# Altium PCB PP_0_3.PcbDoc
Units mm, origin at the board's own origin, x right, y up, seen from the top; angles counter-clockwise.
Board outline 108 x 93.53 mm, 2 copper layers (Top Layer, Bottom Layer), stack 1.58 mm thick; 24 components, 10 nets, 45 pads, 1 vias.
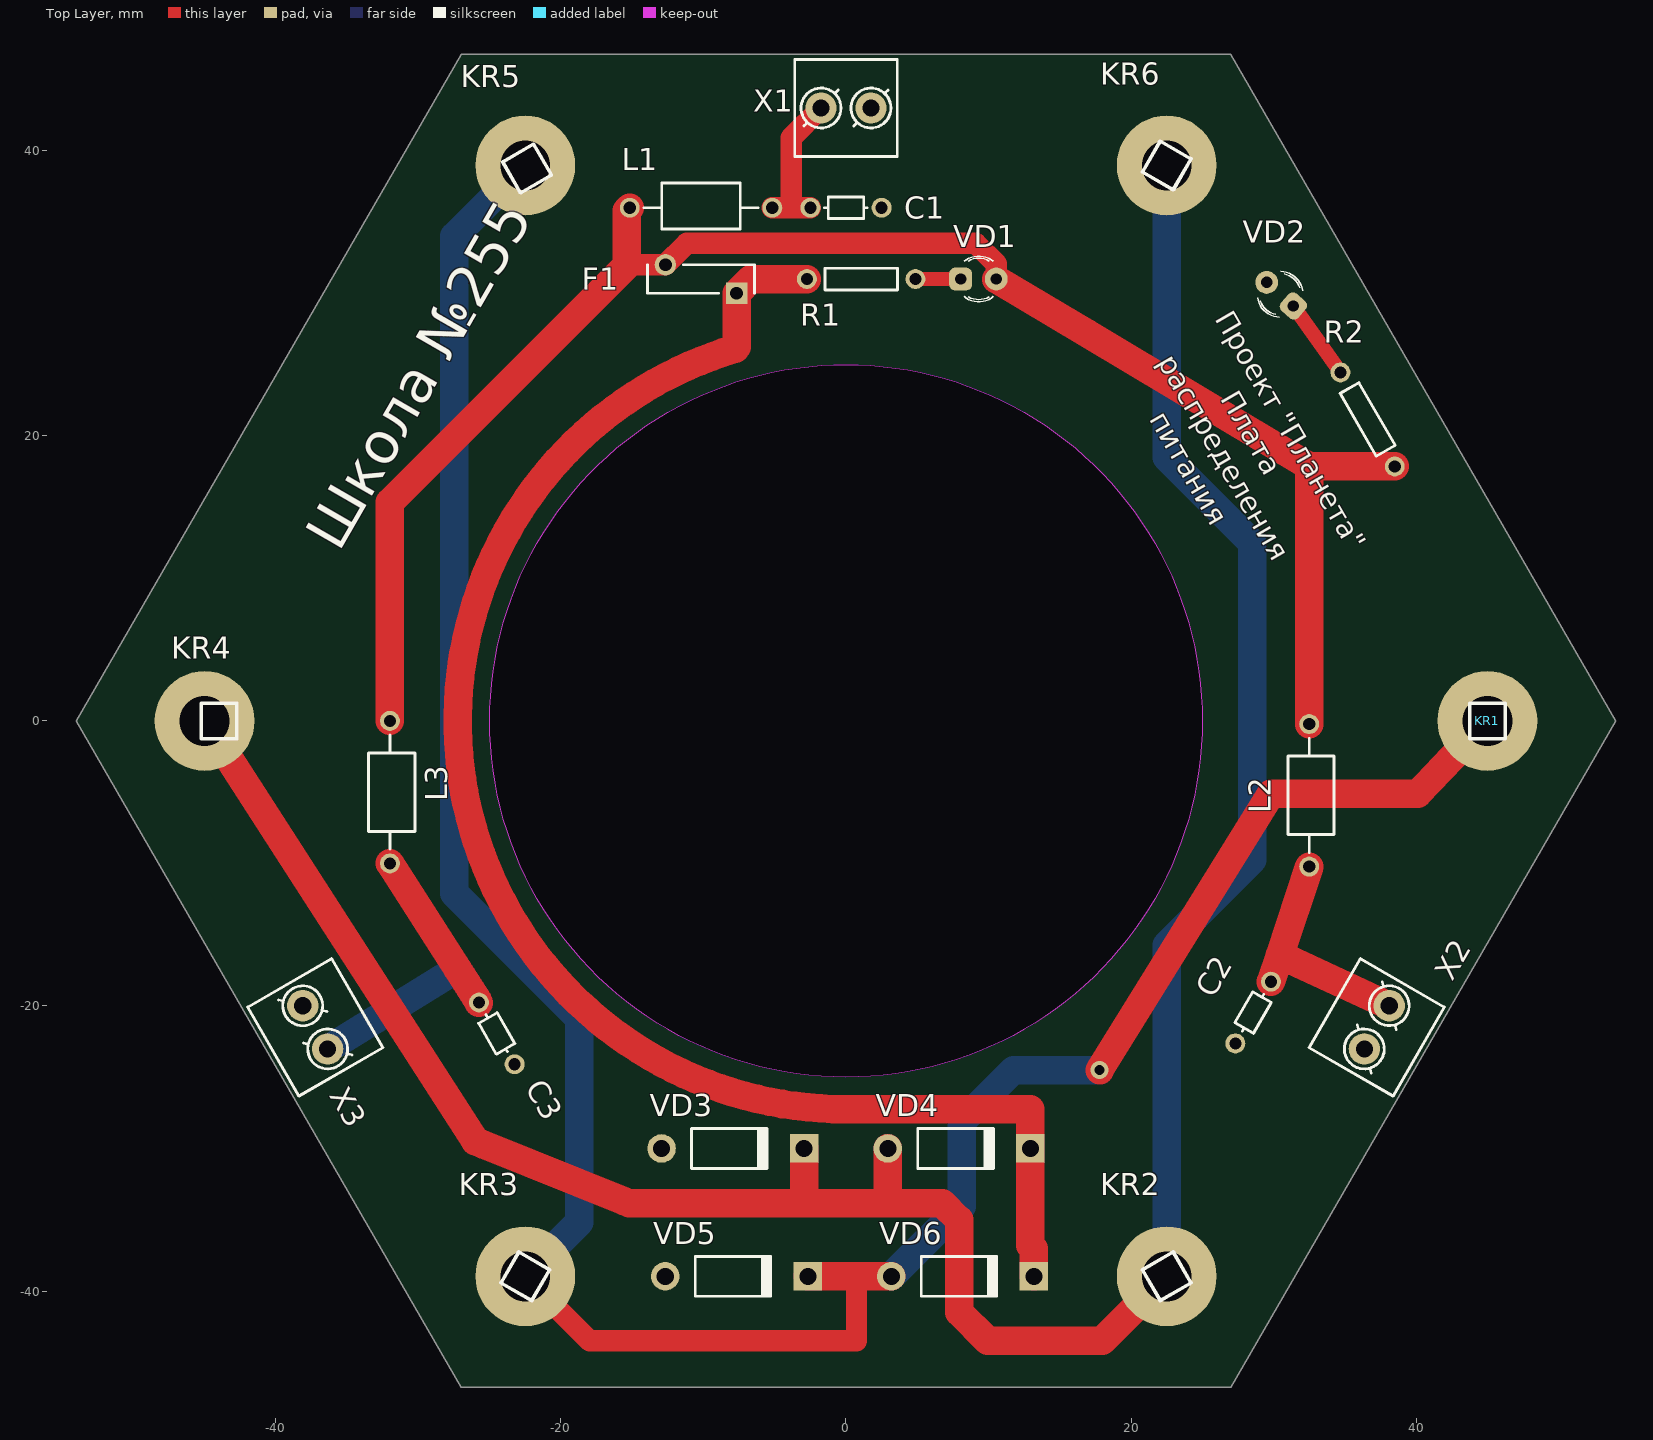
[diagram p0: Top Layer view]
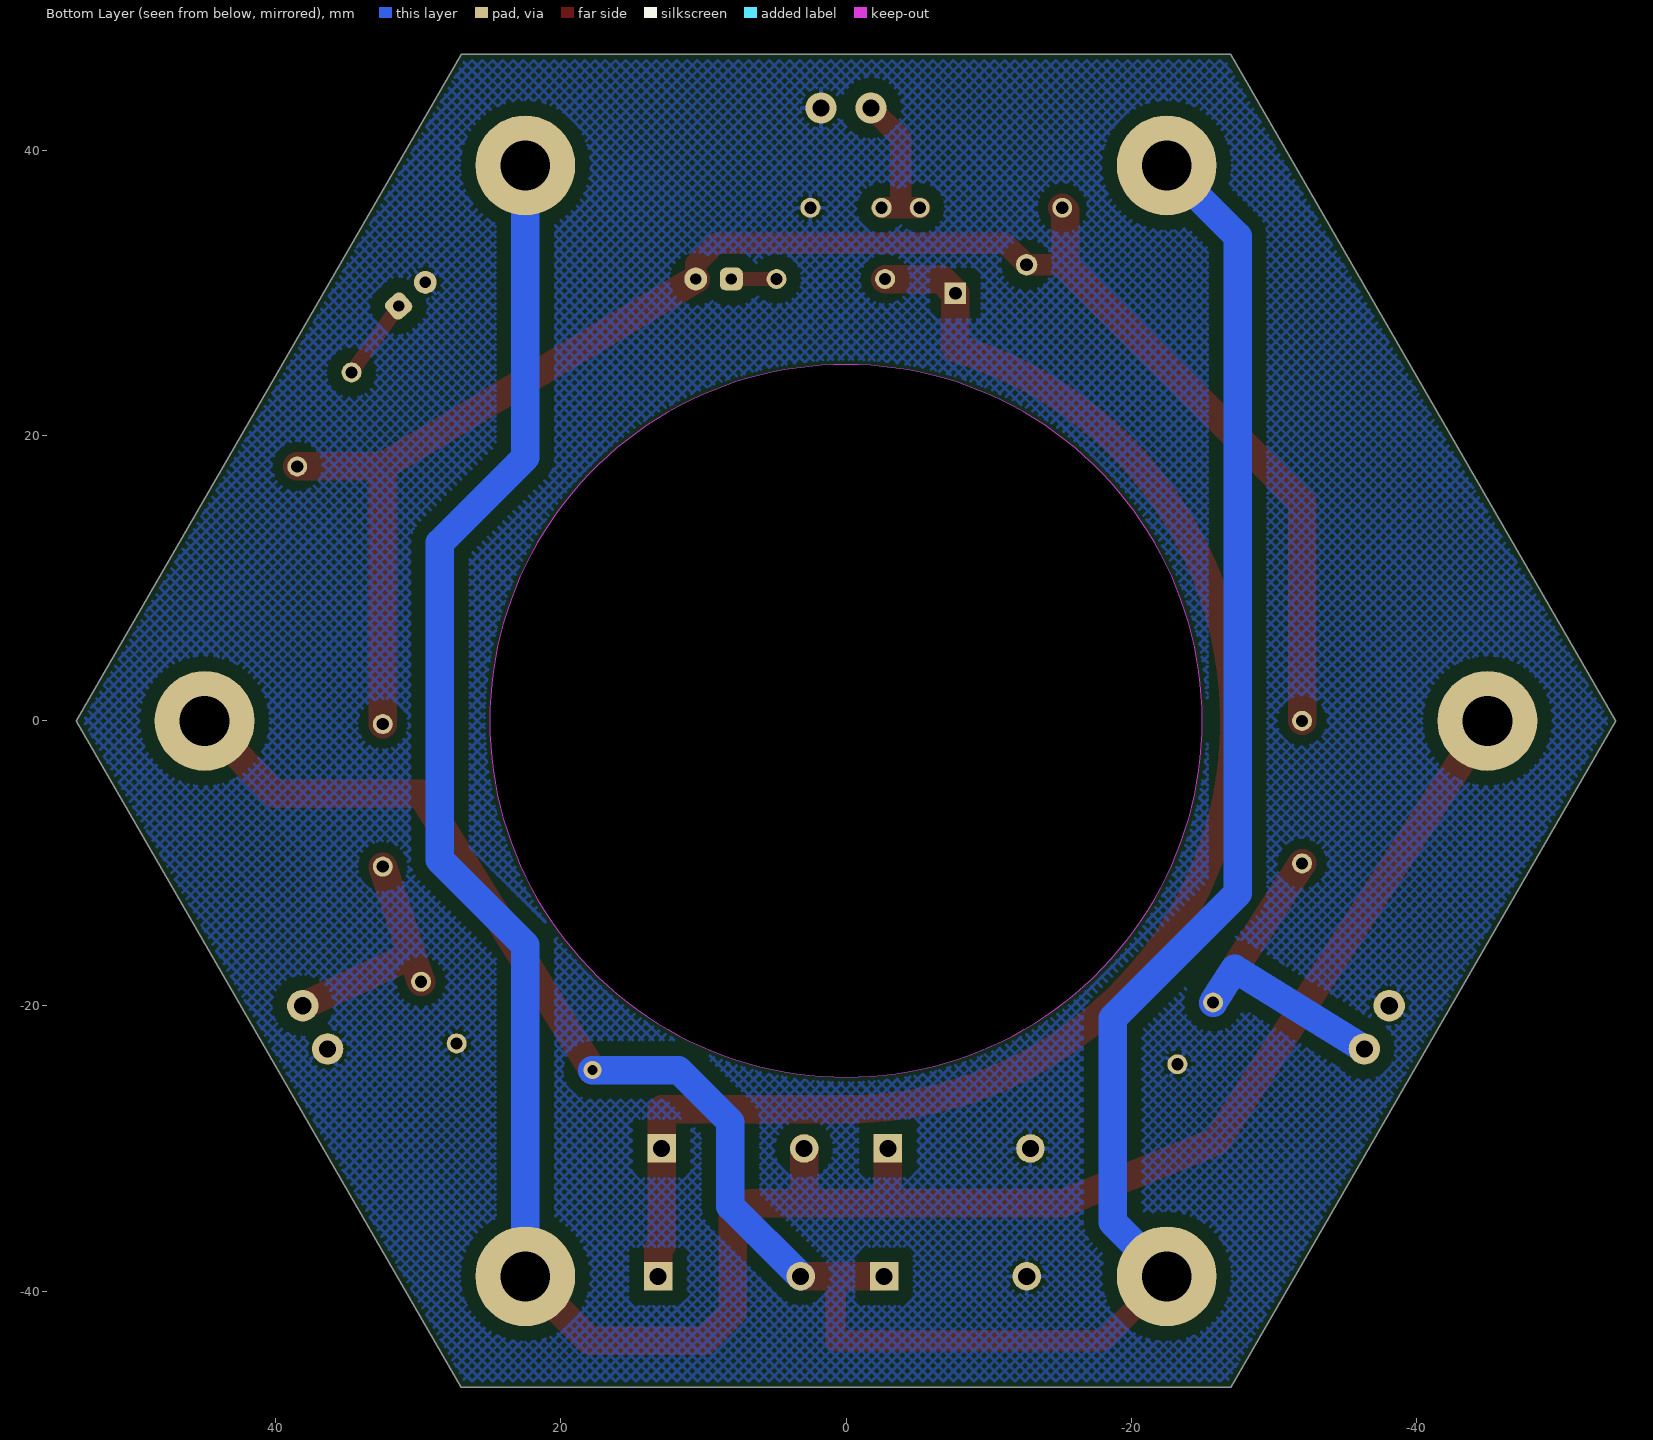
[diagram p1: Bottom Layer view, seen from below]
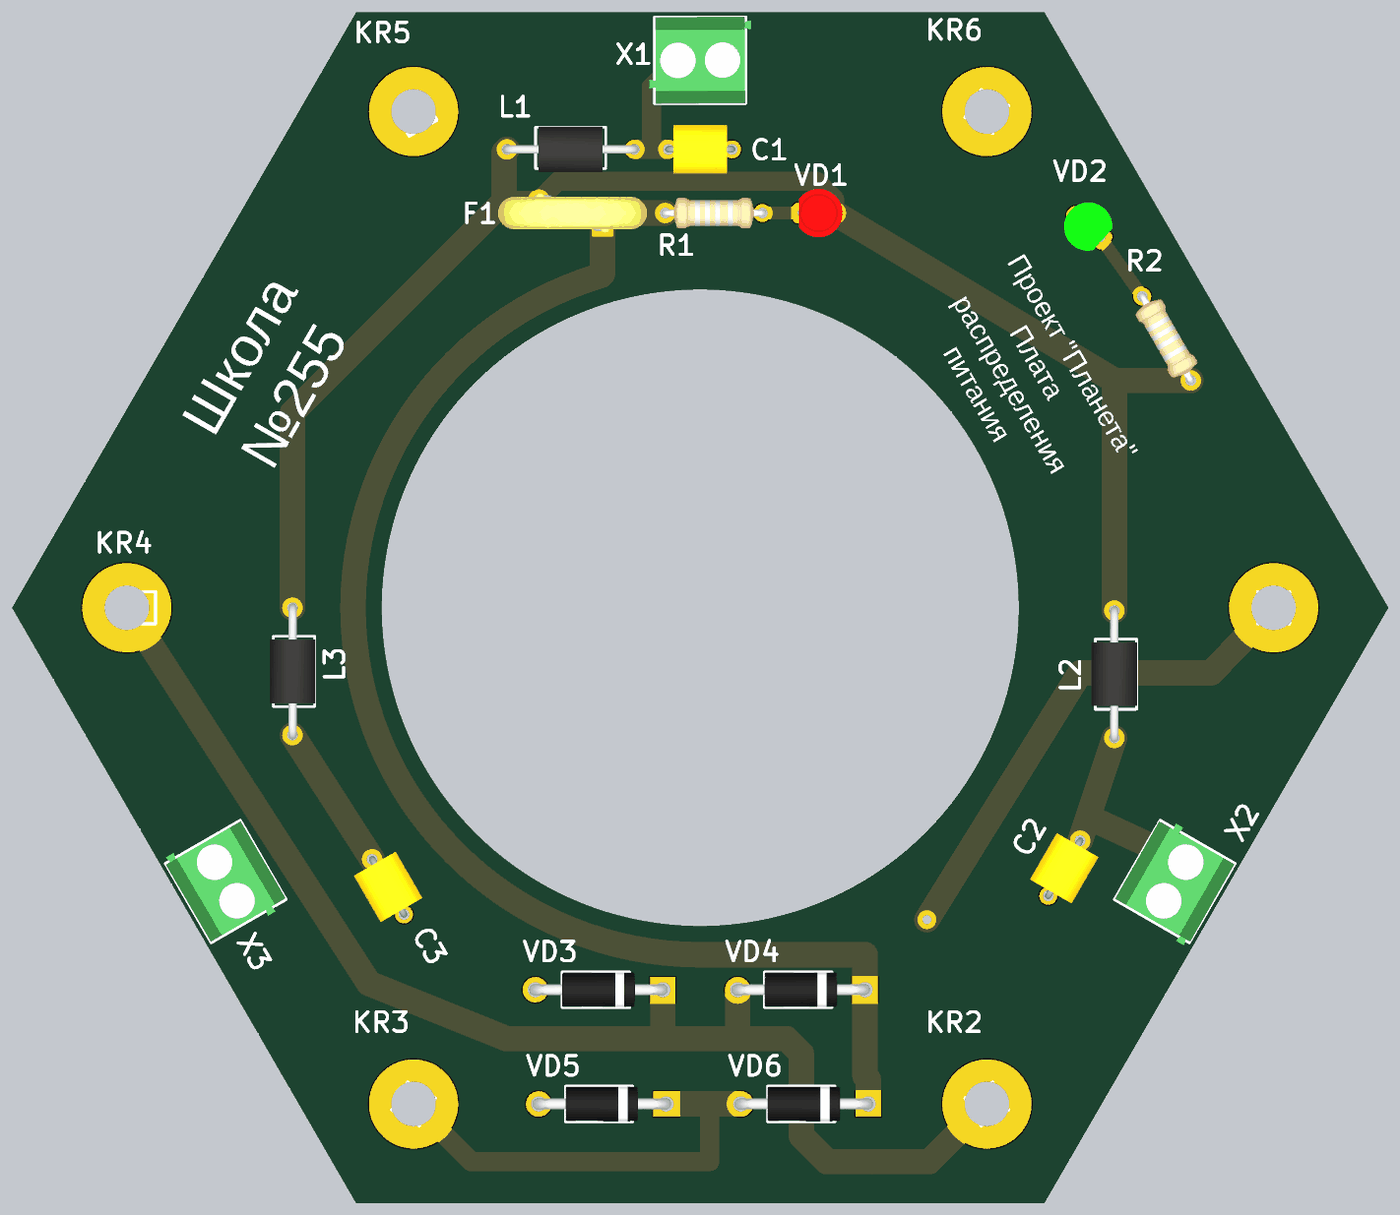
[diagram p2: 3D render of the assembled board from above, using the file's embedded part models]

## Layer stack, top to bottom
Top Solder: solder mask 0.0102, Solder Resist, Dk 3.5
Top Layer: signal copper 0.0356
Dielectric 1: dielectric 1.509, FR-4, Dk 4.8
Bottom Layer: signal copper 0.0356
Bottom Solder: solder mask 0.0102, Solder Resist, Dk 3.5

## Board outline
-27,-46.765 -54,0 -27,46.765 27,46.765 54,0 27,-46.765
cut-out: 0,-25 cw(c0,0) -25,0 cw(c0,0) 0,25 cw(c0,0) 25,0 cw(c0,0)

## Design rules (kind name [scope] priority, off if disabled: settings)
Clearance [All] p1: gap=0.254 ignorepadtopadclearanceinfootprint=TRUE except(0: Arc-Hole Track-Hole SMDPad-Hole THPad-Hole Via-Hole Fill-Hole Poly-Hole Region-Hole Text-Hole; 1: Arc-Fill Arc-Poly Arc-Region Track-Fill Track-Poly Track-Region SMDPad-Fill SMDPad-Poly SMDPad-Region THPad-Fill THPad-Poly THPad-Region Via-Fill Via-Poly Via-Region)
ComponentClearance [All] p1: gap=0.254 collisioncheckmode=3 verticalgap=0.254 showdistances=TRUE
HoleSize [All] p1: absolutevalues=TRUE maxlimit=3.5 minlimit=0.025 maxpercent=80.000 minpercent=20.000
PolygonConnect [All] p1: connectstyle=Relief reliefconductorwidth=0.254 reliefentries=4 polygonreliefangle="90 Angle" airgapwidth=0.254
RoomDefinition PP_0_3 [InComponentClass('PP_0_3')] p1: confinementstyle=ConfineIn formatcopy=TRUE lockcomponents=FALSE outline -53,-46.5 53.5,-46.5 53.5,47.5 -53,47.5
RoutingVias [All] p1: holewidth=0.711 width=1.27 viastyle="Through Hole" minholewidth=0.711 minwidth=1.27 maxholewidth=0.711 maxwidth=1.27
SilkToSolderMaskClearance [IsText] p1: minsilkscreentomaskgap=0.254 clearancetoexposedcopper=TRUE
SolderMaskExpansion [All] p1: expansion=0.102 istentingtop=FALSE
Width "Schematic Width Constraint_9" [InNetClass('Power')] p1: maxlimit=2.5 minlimit=1.5 preferedwidth=2 minimp=50.000000 maximp=50.000000 favimp=50.000000
Width "Schematic Width Constraint_8" [InNet('VD1_A')] p2: maxlimit=1 minlimit=0.254 preferedwidth=1
Width "Schematic Width Constraint_7" [InNet('VD2_A')] p3: maxlimit=1 minlimit=0.254 preferedwidth=1
Width "Schematic Width Constraint_4" [InNet('OUT2')] p4: maxlimit=2.5 minlimit=1.5 preferedwidth=2 minimp=50.000000 maximp=50.000000 favimp=50.000000
Width "Schematic Width Constraint_3" [InNet('OUT1')] p5: maxlimit=2.5 minlimit=1.5 preferedwidth=2 minimp=50.000000 maximp=50.000000 favimp=50.000000
Width "Schematic Width Constraint_2" [InNet('OUT3')] p6: maxlimit=2.5 minlimit=1.5 preferedwidth=2 minimp=50.000000 maximp=50.000000 favimp=50.000000
Width [All] p7: maxlimit=2 minlimit=1 preferedwidth=1.5 minimp=50.000000 maximp=50.000000 favimp=50.000000
27 further rules are at their usual default settings.

## Classes and differential pairs
net class Power: GND IN1 IN2 OUT_PLUS VCC
component class PP_0_3: C1 C2 C3 F1 KR1 L1 L2 L3 R1 R2 VD1 VD2 VD3 VD4 VD5 VD6 X1 X2 X3

## Components (designator, comment, footprint, x,y, rotation, side; value= is the part's Value field where it differs from the comment)
C1 "Ceramic capacitor, 1μF, X7R, ±10%, 50V, 0805, -55...+125°C" "CAP: 0805, Thru-Hole" 0,36 r0 top value=1μF
C2 "Ceramic capacitor, 1μF, X7R, ±10%, 50V, 0805, -55...+125°C" "CAP: 0805, Thru-Hole" 28.565,-20.464 r60 top value=1μF
C3 "Ceramic capacitor, 1μF, X7R, ±10%, 50V, 0805, -55...+125°C" "CAP: 0805, Thru-Hole" -24.5,-21.924 r300 top value=1μF
F1 "Fuse 1A" MF-R_Style_1 -10.173,31 r180 top value=1A
KR1 "KR_3" KR_3_0#1 45,0 r0 top
KR2 "KR_3" KR_3_0#1 22.5,-38.971 r300 top
KR3 "KR_3" KR_3_0#1 -22.5,-38.971 r240 top
KR4 "KR_3" KR_3_0#2 -44,0 r180 top
KR5 "KR_3" KR_3_0#3 -22.375,38.755 r120 top
KR6 "KR_3" KR_3_0#1 22.5,38.971 r60 top
L1 "Fixed inductor, 1μH, ±20%, BL-01, Kool Mu, µ=125, 90 нГн/витков2" "IND: BL-01" -10.173,36 r180 top value=1μH
L2 "Fixed inductor, 1μH, ±20%, BL-01, Kool Mu, µ=125, 90 нГн/витков2" "IND: BL-01" 32.5,-5.226 r90 top value=1μH
L3 "Fixed inductor, 1μH, ±20%, BL-01, Kool Mu, µ=125, 90 нГн/витков2" "IND: BL-01" -32,-5 r90 top value=1μH
R1 "Resistor film, 270, ±5%, CF-25, 0.25W, -55...+125°C" AXIAL-0.3 1.064,31 r0 top value=270
R2 "Resistor film, 270, ±5%, CF-25, 0.25W, -55...+125°C" AXIAL-0.3 36.595,21.15 r300 top value=270
VD1 "LED, Red, *, *, *, -55...+150°C" "LED: 3MM_R" 9.291,31 r90 top
VD2 "LED, Green, *, *, *, -55...+150°C" "LED: 3MM_G" 30.453,29.935 r228.48 top
VD3 "Schottky diode, 100V, 1A, 1V, 15pF, DO-41, -55...+150°C" "DIODE: DO-41" -8.187,-30 r0 top
VD4 "Schottky diode, 100V, 1A, 1V, 15pF, DO-41, -55...+150°C" "DIODE: DO-41" 7.687,-30 r0 top
VD5 "Schottky diode, 100V, 1A, 1V, 15pF, DO-41, -55...+150°C" "DIODE: DO-41" -7.93,-38.971 r0 top
VD6 "Schottky diode, 100V, 1A, 1V, 15pF, DO-41, -55...+150°C" "DIODE: DO-41" 7.93,-38.971 r0 top
X1 "Terminal connector, 2pin, 3.5mm, 300VAC, 10A" "CON: DG350-3.5-02P" 0,43 r0 top
X2 "Terminal connector, 2pin, 3.5mm, 300VAC, 10A" "CON: DG350-3.5-02P" 37.239,-21.5 r240 top
X3 "Terminal connector, 2pin, 3.5mm, 300VAC, 10A" "CON: DG350-3.5-02P" -37.239,-21.5 r120 top

## Footprints (in the part's own frame and the unit in brackets; to place one, negate y for a bottom-side part, rotate by r counter-clockwise, add the part's x,y. Pads: shape width x height; smd on the part's side, far side on the other; paste and mask are expansions set on the pad)
AXIAL-0.3 [mm] "Axial Device, Thru-Hole; 2 Leads; 0.3 in Pin Spacing"
  round 1.4 hole 0.85: 1(-3.81,0) 2(3.81,0)
  silkscreen extent -2.54,-0.76 2.54,0.76, body extent -4.08,-1.2 4.09,1.2, height 2.45
"CAP: 0805, Thru-Hole" [mm] "CerCap, 0805, Thru-Hole; 2 Leads; 5mm in Pin Spacing"
  round 1.4 hole 0.85: 1(-2.5,0) 2(2.5,0)
  silkscreen extent -1.52,-0.75 1.48,0.75, body extent -2.75,-1.9 2.75,1.91, height 4.7
"CON: DG350-3.5-02P" [mm]
  round 2.2 hole 1.2: 1(-1.75,0) 2(1.75,0)
  round 0.5 on Top Overlay: ""(-3.1,-2.9)
  silkscreen extent -3.6,-3.4 3.6,3.4, body extent -4,-3.4 4,3.4, height 8.4
"DIODE: DO-41" [mm] "Diode, Axial; Body 5.2 x 2.7 mm (LxDia. max), Lead Dia. 0.86 mm (max)"
  round 2 hole 1.2: 1(-4.75,0)
  rect 2x2 hole 1.2: 2(5.25,0)
  silkscreen extent -2.65,-1.4 2.75,1.4, body extent -5.23,-1.36 5.63,1.36, height 3.36
"IND: BL-01" [mm] "Axial Device, Thru-Hole; 2 Leads; 0.4 in Pin Spacing"
  round 1.4 hole 0.85: 1(-5,0) 2(5,0)
  silkscreen extent -4,-1.75 4,1.5, body extent -5.32,-1.8 5.33,1.8, height 4.1
KR_3_0#1 [mm] "Plated hole diam 3,5 mm"
  round 7 hole 3.5: 0(0,0)
  silkscreen extent -1.25,-1.25 1.25,1.25
KR_3_0#2 [mm] "Plated hole diam 3,5 mm"
  round 7 hole 3.5: 0(1,0)
  silkscreen extent -1.25,-1.25 1.25,1.25
KR_3_0#3 [mm] "Plated hole diam 3,5 mm"
  round 7 hole 3.5: 0(0.25,0)
  silkscreen extent -1.25,-1.25 1.25,1.25
"LED: 3MM_G" [mm] "LED; 2 Leads"
  rrect50% 1.6x1.6 hole 0.8: 1(0,1.25)
  round 1.6 hole 0.8: 2(0,-1.25)
  silkscreen extent -1.6,-1.03 1.6,1.03, body extent -1.9,-1.9 1.9,1.53, height 7.14
"LED: 3MM_R" [mm] "LED; 2 Leads"
  rrect50% 1.6x1.6 hole 0.8: 1(0,1.25)
  round 1.6 hole 0.8: 2(0,-1.25)
  silkscreen extent -1.59,-1.05 1.6,1, body extent -1.9,-1.9 1.9,1.53, height 6.64
MF-R_Style_1 [mm] "Thru-Hole; 2 Leads"
  rect 1.5x1.5 hole 0.9: 1(-2.5,1)
  round 1.5 hole 0.9: 2(2.5,-1)
  silkscreen extent -3.75,-1 3.75,1, body extent -6,-1.55 5.7,1.55, height 17.05

## Part data
C1 C2 C3: library part Ceramic_0805, "К10-17 0805", Manufacturer=Murata, Package=0805, PartNumber=RDER71H105K2K1C03B, Temperature=-55...+125°C, Tolerance=±10%, TypeCapacitor="Ceramic capacitor", TypeDielectric=X7R, Voltage=50V, HelpURL=https://www.chipdip.ru/product0/9000238474, ValueManufacturerPartNumber="Ceramic capacitor, 1μF, X7R, ±10%, 50V, 0805, -55...+125°C"
  C1: ClassName=Groupe1
  C2: ClassName=Groupe2
  C3: ClassName=Groupe3
KR1 KR2 KR3 KR4 KR5 KR6: "Mounting point"
L1 L2 L3: library part "IND: BL-01", "Индуктивность  подавления ЭМП", Manufacturer=Murata, Package=BL-01, PartNumber=30201567, Tolerance=±20%, TypeInductor="Fixed inductor", ValueManufacturerPartNumber="Fixed inductor, 1μH, ±20%, BL-01, Kool Mu, µ=125, 90 нГн/витков2", AL="90 нГн/витков2", HelpURL=https://www.chipdip.ru/product/bl01rn1a2a2b, MaterialPermeability=µ=125, TypeMatiriel="Kool Mu"
  L1: ClassName=Groupe1
  L2: ClassName=Groupe2
  L3: ClassName=Groupe3
R1 R2: library part ResistorCF-25, Manufacturer=Yageo, Package=CF-25, PartNumber=СF-1/4W-100RF, Power=0.25W, Temperature=-55...+125°C, Tolerance=±5%, TypeResistor="Resistor film", HelpURL=https://www.digikey.com/product-detail/en/yageo/RC0201JR-07100RL/311-100NCT-ND/1949006, ValueManufacturerPartNumber="Resistor film, 270, ±5%, CF-25, 0.25W, -55...+125°C"
VD1: library part LED_single, Color=RED, ColorParameter=Red, Temperature=-55...+150°C, TypeDiode=LED, ValueManufacturerPartNumber="LED, Red, *, *, *, -55...+150°C"
VD2: library part LED_single, Color=GREEN, ColorParameter=Green, Temperature=-55...+150°C, TypeDiode=LED, ValueManufacturerPartNumber="LED, Green, *, *, *, -55...+150°C"
VD3 VD4 VD5 VD6: library part Schottky_1A, Current=1A, Manufacturer="Diodes Incorporated", Package=DO-41, PartNumber=MBR1100G, Temperature=-55...+150°C, Voltage=100V, VoltageDrop=1V, ClassName=Rectifier, HelpURL=https://www.digikey.com/product-detail/en/diodes-incorporated/MBR0580S1-7/MBR0580S1-7DICT-ND/5080371, RecoveryTime=15pF, TypeDiode="Schottky diode", ValueManufacturerPartNumber="Schottky diode, 100V, 1A, 1V, 15pF, DO-41, -55...+150°C"
X1 X2 X3: library part Connector_terminal_2pin, CurrentMax=10A, Manufacturer=Degson, PartNumber=DG350-3.5-02P-14, VoltageMax=300VAC, CommentText="\"Разъем\"", HelpURL=https://www.chipdip.ru/product/dg350-3.5-02p-12, Multichannel=2pin, Pitch=3.5mm, TypeConnector="Terminal connector", ValueManufacturerPartNumber="Terminal connector, 2pin, 3.5mm, 300VAC, 10A"
  X1: ClassName=Groupe1
  X2: ClassName=Groupe2
  X3: ClassName=Groupe3
F1: LatestRevisionDate=17-Jul-2002, LatestRevisionNote="Re-released for DXP Platform.", PackageDescription="Thru-Hole; 2 Leads", PackageReference=MF-R_Style_2, Published=8-Jun-2000, Publisher="Altium Limited"

## Via types
v1: diameter 1.27, hole 0.711, Top Layer to Bottom Layer, 1 vias

## Nets (pads, with @x,y where several pads share a name; then routed paths per layer and width w, separated by ;. In a path a pad name is that pad's centre, name@x,y a point inside that pad or via, vN(x,y) a via of type N, cw(c..) or ccw(c..) an arc to the next point about the centre after c; other vN are vias at no path point)
GND: C1.2 C2.1 C3.2 VD2.2 VD3.1 VD5.1 X1.2 X2.2 X3.2
IN1: KR2.0 KR4.0 KR6.0 VD3.2 VD4.1 | length 184.1
  Top Layer w2: KR4.0@-44.076,-0.352 -44.252,-1.162 -26,-29.5 -25.409,-29.737 -15.554,-33.699 -15.195,-33.843 -14.808,-33.843 -2.937,-33.843 ; VD3.2 -2.937,-33.843 ; VD4.1 2.937,-33.843 ; KR2.0 17.971,-43.5 9.951,-43.5 7.93,-41.478 7.93,-35.015 6.758,-33.843 2.937,-33.843 ; -2.937,-33.843 2.937,-33.843
  Bottom Layer w2: KR2.0 22.5,-15.749 28.5,-9.749 28.5,12.481 22.5,18.481 KR6.0
IN2: KR1.0 KR3.0 KR5.0 VD5.2 VD6.1 | length 184.9
  Top Layer w1.5: KR3.0 -17.971,-43.5 0.737,-43.5 0.737,-38.971
  Top Layer w2: VD5.2 0.737,-38.971 VD6.1 ; v1(17.789,-24.5) 29.815,-5.112 40.106,-5.112 KR1.0@44.981,0
  Bottom Layer w2: KR3.0 -18.708,-35.179 -18.708,-33.091 -18.708,-20.855 -27.48,-12.083 -27.48,33.991 KR5.0 ; VD6.1 8.106,-34.045 8.106,-28.147 11.753,-24.5 v1(17.789,-24.5)
OUT1: C1.1 L1.1 X1.1 | length 10.5
  Top Layer w1.5: L1.1 -3.836,36 ; C1.1 -3.836,36 ; X1.1 -3.836,40.914 -3.836,36
OUT2: C2.2 L2.1 X2.1 | length 17
  Top Layer w2: C2.2 30.436,-16.431 ; L2.1 30.436,-16.431 ; X2.1 30.436,-16.431
OUT3: C3.1 L3.1 X3.1 | length 25.1
  Top Layer w2: L3.1 -27.259,-17.402 C3.1@-25.75,-19.759
  Bottom Layer w2: X3.1 -27.259,-17.402 C3.1
OUT_PLUS: F1.1 R1.1 VD4.2 VD6.2 | length 111.7
  Top Layer w2: R1.1 -6.673,31 F1.1 -7.673,26.235 -7.767,26.109 ccw(c-0.043,0.032) -21.834,16.304 ccw(c0,0) 0,-27.25 12.937,-27.25 VD4.2 12.937,-36.779 13.18,-37.022 VD6.2
VCC: F1.2 L1.2 L2.2 L3.2 R2.2 VD1.2 | length 120.8
  Top Layer w1.5: -15.389,32.062 -15.327,32 F1.2 -11.173,33.5 9.112,33.5 10.541,32.071 VD1.2
  Top Layer w2: L3.2 -32,15.327 -15.327,32 ; -15.389,32.062 -15.389,35.784 L1.2 ; VD1.2 16.916,27.182 32.5,17.85 ; L2.2 32.5,17.85 ; R2.2 32.5,17.85
VD1_A: R1.2 VD1.1 | length 3.2
  Top Layer w1: R1.2 VD1.1
VD2_A: R2.1 VD2.1 | length 5.7
  Top Layer w1: VD2.1 R2.1
pads on no net: X1. X2. X3.

## Polygon pours and split planes (outlines as drawn)
GND on Bottom Layer "GND_L02_P002" (hatched 45Degree grid 0.508 track 0.203, pour order 2): -53.5,0 -26.567,46.332 -26.75,46.332 26.75,46.332 53.5,0 26.75,-46.332 -26.75,-46.332

## Silkscreen, mask and mechanical layers (free items; w line width, h text height)
Top Overlay:
  text "Проект \"Планета\" /         Плата /  распределения /       питания" at 18.932,24.231 h2.5 r300
  text "Школа №255" at -34.714,11.279 h5 r60
Top Assy:
  circle w0.25: c0,0 r25.5
  circle w0.2: c0,0 r54
  lines w0.2: -30,-51.962 0,0 ; -30,51.962 0,0 ; 30,-51.962 0,0 ; 30,51.962 0,0 ; 60,0 0,0 ; 0,0 -60,0 0,0
Bottom Assy:
  pour cut-out: 0,-25 cw(c0,0) -25,0 cw(c0,0) 0,25 cw(c0,0) 25,0 cw(c0,0)
Border:
  circle w0.25: c0,0 r25
  lines w0.2: -54,0 -27,-46.765 27,-46.765 54,0 27,46.765 -27,46.765 -54,0